# Altium PCB PCB2.PcbDoc
Units mil, origin at the board's own origin, x right, y up, seen from the top; angles counter-clockwise.
Board outline 800 x 1050 mil, 2 copper layers (Top Layer, Bottom Layer); 19 components, 43 nets, 110 pads, 1 vias.
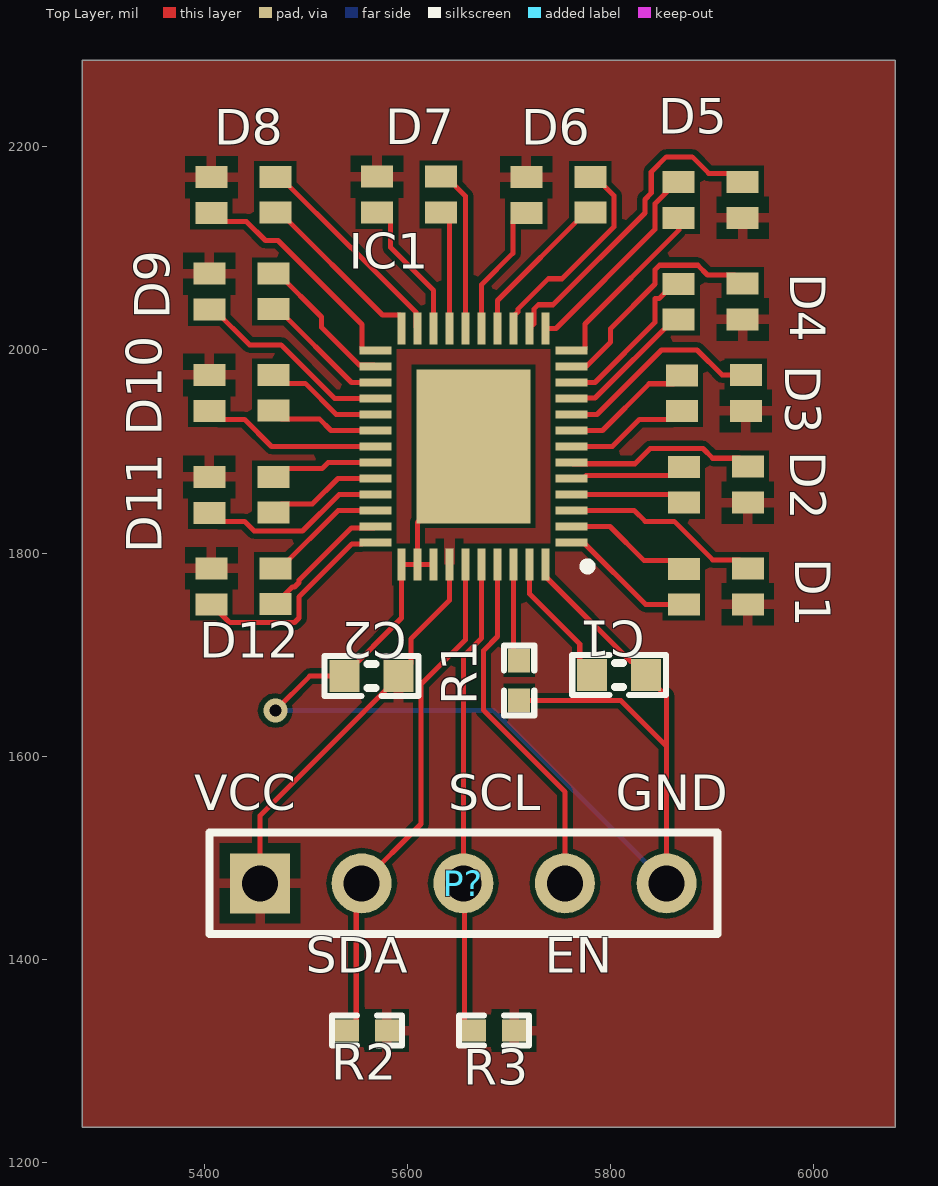
[diagram p0: Top Layer view]
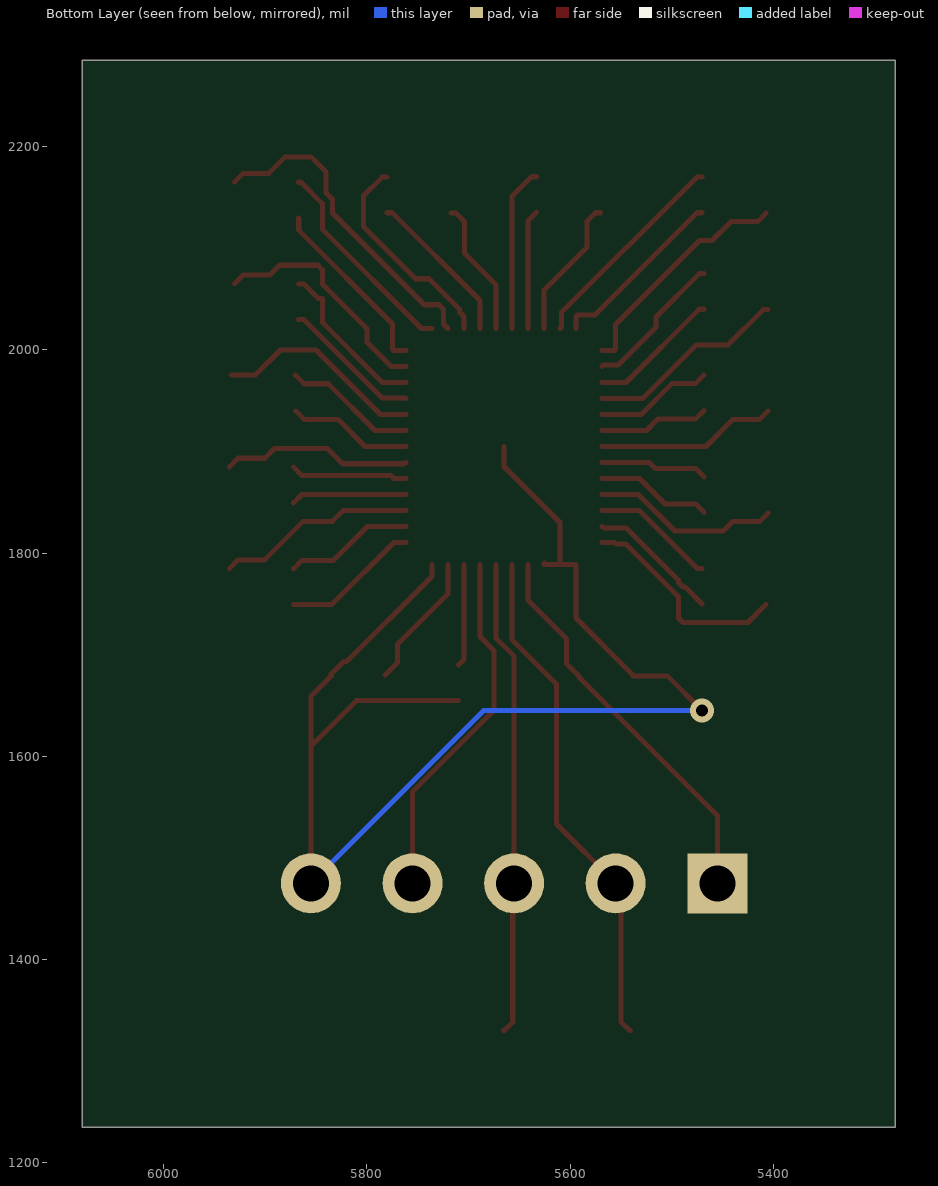
[diagram p1: Bottom Layer view, seen from below]

## Layer stack, top to bottom
Top Solder: solder mask 0.4, Solder Resist, Dk 3.5
Top Layer: signal copper 1.4
Dielectric 1: dielectric 12.6, FR-4, Dk 4.8
Bottom Layer: signal copper 1.4
Bottom Solder: solder mask 0.4, Solder Resist, Dk 3.5

## Board outline
5280,1235 5280,2285 6080,2285 6080,1235

## Design rules (kind name [scope] priority, off if disabled: settings)
Clearance [All] p1: gap=5 ignorepadtopadclearanceinfootprint=FALSE
PolygonConnect [All] p1: connectstyle=Relief reliefconductorwidth=10 reliefentries=4 polygonreliefangle="90 Angle" airgapwidth=10
RoutingVias [All] p1: holewidth=28 width=50 viastyle="Through Hole" minholewidth=28 minwidth=50 maxholewidth=28 maxwidth=50
SolderMaskExpansion [All] p1: expansion=4
Width [All] p1: maxlimit=5 minlimit=5 preferedwidth=5
30 further rules are at their usual default settings.

## Components (designator, comment, footprint, x,y, rotation, side; value= is the part's Value field where it differs from the comment)
C1 "0603 Cap" "0603 Cap" 5808.43,1680 r180 top
C2 "0603 Cap" "0603 Cap" 5564.56,1678.87 r180 top
D1 "Component_1" PCBComponent_1 5872.01,1749.57 r0 top
D2 "Component_1" PCBComponent_1 5872.01,1849.57 r0 top
D3 "Component_1" PCBComponent_1 5870,1940 r0 top
D4 "Component_1" PCBComponent_1 5867.01,2030 r0 top
D5 "Component_1" PCBComponent_1 5867.01,2130 r0 top
D6 "Component_1" PCBComponent_1 5780,2170 r180 top
D7 "Component_1" PCBComponent_1 5632.99,2170.43 r180 top
D8 "Component_1" PCBComponent_1 5470,2170 r180 top
D9 "Component_1" PCBComponent_1 5467.99,2075 r180 top
D10 "Component_1" PCBComponent_1 5467.99,1975.43 r180 top
D11 "Component_1" PCBComponent_1 5467.99,1875 r180 top
D12 "Component_1" PCBComponent_1 5470,1785 r180 top
IC1 "LP5036RJVR" QFN40P500X600X100-47N-D 5665,1905 r180 top
P? "Header 5" HDR1X5 5455,1475 r0 top
R1 "0402 Res" "0402 Res" 5710,1674.69 r270 top
R2 "0402 Res" "0402 Res" 5560,1330 r0 top
R3 "0402 Res" "0402 Res" 5685.31,1330 r0 top

## Footprints (in the part's own frame and the unit in brackets; to place one, negate y for a bottom-side part, rotate by r counter-clockwise, add the part's x,y. Pads: shape width x height; smd on the part's side, far side on the other; paste and mask are expansions set on the pad)
"0402 Res" [mm]
  rect 0.6x0.55 smd: 1(-0.5,0) 2(0.5,0)
  silkscreen extent -0.87,-0.38 0.88,0.38, body extent -0.5,-0.25 0.5,0.25, height 0.3
"0603 Cap" [mm]
  rect 0.75x0.8 smd: 1(-0.675,0) 2(0.675,0)
  silkscreen extent -1.17,-0.5 1.17,0.5, body extent -0.8,-0.43 0.8,0.43, height 0.8
HDR1X5 [mm] "Connector; Header; 5 Position"
  rect 1.5x1.5 hole 0.9: 1(0,0)
  round 1.5 hole 0.9: 2(2.54,0) 3(5.08,0) 4(7.62,0) 5(10.16,0)
  silkscreen extent -1.27,-1.27 11.43,1.27
PCBComponent_1 [mm]
  rect 0.8x0.55 smd: 1(0,0) 2(0,0.889) 3(1.6,0.9) 4(1.6,0)
QFN40P500X600X100-47N-D [mm]
  rect 0.8x0.2 smd: 1(-2.45,2.4) 2(-2.45,2) 3(-2.45,1.6) 4(-2.45,1.2) 5(-2.45,0.8) 6(-2.45,0.4) 7(-2.45,0) 8(-2.45,-0.4) 9(-2.45,-0.8) 10(-2.45,-1.2) 11(-2.45,-1.6) 12(-2.45,-2) 13(-2.45,-2.4) 24(2.45,-2.4) 25(2.45,-2) 26(2.45,-1.6) 27(2.45,-1.2) 28(2.45,-0.8) 29(2.45,-0.4) 30(2.45,0) 31(2.45,0.4) 32(2.45,0.8) 33(2.45,1.2) 34(2.45,1.6) 35(2.45,2) 36(2.45,2.4)
  rect 0.2x0.8 smd: 14(-1.8,-2.95) 15(-1.4,-2.95) 16(-1,-2.95) 17(-0.6,-2.95) 18(-0.2,-2.95) 19(0.2,-2.95) 20(0.6,-2.95) 21(1,-2.95) 22(1.4,-2.95) 23(1.8,-2.95) 37(1.8,2.95) 38(1.4,2.95) 39(1,2.95) 40(0.6,2.95) 41(0.2,2.95) 42(-0.2,2.95) 43(-0.6,2.95) 44(-1,2.95) 45(-1.4,2.95) 46(-1.8,2.95)
  rect 2.85x3.85 smd: 47(0,0)
  silkscreen extent -2.95,2.9 -2.75,3.1, body extent -2.55,-3.05 2.55,3.05, height 1

## Part data
IC1: "Integrated Circuit", Manufacturer_Name="Texas Instruments", Mouser Part Number=595-LP5036RJVR, Datasheet Link=http://www.ti.com/lit/ds/symlink/lp5030.pdf, Height=1mm, Manufacturer_Part_Number=LP5036RJVR, Mouser Price/Stock=https://www.mouser.com/Search/Refine.aspx?Keyword=595-LP5036RJVR
P?: "Header, 5-Pin", LatestRevisionDate=17-Jul-2002, LatestRevisionNote="Re-released for DXP Platform.", Publisher="Altium Limited"

## Via types
v1: diameter 23.62, hole 11.81, Top Layer to Bottom Layer, tented both sides, 1 vias

## Nets (pads, with @x,y where several pads share a name; then routed paths per layer and width w, separated by ;. In a path a pad name is that pad's centre, name@x,y a point inside that pad or via, vN(x,y) a via of type N, cw(c..) or ccw(c..) an arc to the next point about the centre after c; other vN are vias at no path point)
EN: IC1.43 P?.4 | length 352.6
  Top Layer w5: IC1.43 5688.62,1717.83 5675,1704.21 5675,1645 5755,1565 P?.4
GND: C1.1 C2.2 IC1.37 IC1.38 IC1.39 IC1.46 IC1.47 P?.5 R1.2 | length 1371.2
  Top Layer w5: v1(5470,1645) 5503.87,1678.87 C2.2 5537.98,1679.85 5594.13,1736 IC1.37 IC1.38 ; IC1.39 5625.63,1789.37 5625,1790 5625,1789.67 5624.19,1788.86 IC1.38 ; IC1.47 5665,1885.32 5609.88,1830.2 IC1.38 ; R1.2 5810,1655 5855,1610 ; IC1.46 5735.87,1777.05 5819.67,1693.25 5822.74,1693.25 5835,1680.98 C1.1 5835,1679.02 5855,1659.02 5855,1610 ; P?.5 5855,1610
  Bottom Layer w5: v1(5470,1645) 5685,1645 P?.5
NetC1_2: C1.2 IC1.45 | length 134.4
  Top Layer w5: IC1.45 5720.12,1759.88 5769.59,1710.41 5769.59,1692.26 C1.2
NetIC1_44: IC1.44 R1.1 | length 101.1
  Top Layer w5: IC1.44 5704.37,1695.31 R1.1@5709.69,1690
OUT0: D1.1 IC1.1 | length 135.8
  Top Layer w5: IC1.1 5773.27,1810.51 5834.21,1749.57 D1.1
OUT1: D1.2 IC1.2 | length 127.8
  Top Layer w5: IC1.2 5799.33,1826.26 5832.7,1792.89 5863.68,1792.89 D1.2
OUT2: D1.3 IC1.3 | length 197.2
  Top Layer w5: IC1.3 5823.17,1842.01 5833.94,1831.24 5862.52,1831.24 5900.43,1793.33 5926.67,1793.33 D1.3
OUT3: D2.1 IC1.4 | length 113.9
  Top Layer w5: IC1.4 5863.82,1857.76 D2.1
OUT4: D2.2 IC1.5 | length 115.1
  Top Layer w5: IC1.5 5773.27,1873.5 5776,1876.24 5863.68,1876.24 D2.2
OUT5: D2.3 IC1.6 | length 187.7
  Top Layer w5: IC1.6 5762.78,1887.93 5823.92,1887.93 5838.89,1902.89 5890.86,1902.89 5900.43,1893.33 5926.67,1893.33 D2.3
OUT6: D3.1 IC1.7 | length 123
  Top Layer w5: IC1.7 5801.67,1905 5828.35,1931.67 5861.67,1931.67 D3.1
OUT7: D3.2 IC1.8 | length 131
  Top Layer w5: IC1.8 5792.05,1920.75 5837.97,1966.67 5861.67,1966.67 D3.2
OUT8: D3.3 IC1.9 | length 208
  Top Layer w5: IC1.9 5786.5,1936.5 5850,2000 5885,2000 5909.57,1975.43 D3.3
OUT9: D4.1 IC1.10 | length 137.8
  Top Layer w5: IC1.10 5761.83,1952.62 5784.7,1952.62 5862.09,2030 D4.1
OUT10: D4.2 IC1.11 | length 159.5
  Top Layer w5: IC1.11 5784.68,1967.99 5843.76,2027.07 5843.76,2050.65 5847.74,2050.65 5862.09,2065 D4.2
OUT11: D4.3 IC1.12 | length 233.3
  Top Layer w5: IC1.12 5776,1983.74 5800,2007.74 5800,2021.03 5843.76,2064.79 5843.76,2078.93 5848.15,2083.33 5885.86,2083.33 5895.43,2073.76 5921.67,2073.76 D4.3
OUT12: D5.1 IC1.13 | length 181.2
  Top Layer w5: IC1.13 5773.27,1999.49 5774.7,2000.93 5774.7,2025.56 5867.01,2117.87 D5.1
OUT13: D5.2 IC1.14 | length 205.5
  Top Layer w5: IC1.14 5746.14,2021.14 5843.76,2118.76 5843.76,2143.93 5864.83,2165 D5.2
OUT14: D5.3 IC1.15 | length 318.7
  Top Layer w5: IC1.15 5724.43,2025.45 5724.43,2040 5728.82,2044.39 5742.91,2044.39 5743.14,2044.16 5833.76,2134.78 5833.76,2148.08 5840,2154.32 5840,2175.17 5854.83,2190 5880.26,2190 5896.5,2173.76 5921.67,2173.76 D5.3
OUT15: D6.1 IC1.16 | length 210.2
  Top Layer w5: IC1.16 5704.37,2032.95 5708.68,2037.26 5708.68,2040 5738.68,2070 5752.18,2070 5803.25,2121.07 5803.25,2151.67 5784.92,2170 D6.1
OUT16: D6.2 IC1.17 | length 154.6
  Top Layer w5: IC1.17 5688.62,2048.54 5775.08,2135 D6.2
OUT17: D6.3 IC1.18 | length 134.6
  Top Layer w5: IC1.18 5672.87,2064.15 5703.76,2095.04 5703.76,2126.24 5712.09,2134.57 D6.3
OUT18: D7.1 IC1.19 | length 162.2
  Top Layer w5: D7.1 5637.91,2170.43 5657.13,2151.22 5657.13,2092.97 IC1.19
OUT19: D7.2 IC1.20 | length 117.8
  Top Layer w5: D7.2 5633.05,2135.43 5641.38,2127.11 IC1.20
OUT20: D7.3 IC1.21 | length 139.8
  Top Layer w5: D7.3 5574.92,2135 5583.25,2126.67 5583.25,2101 5625.63,2058.62 IC1.21
OUT21: D8.1 IC1.22 | length 210.1
  Top Layer w5: D8.1 5474.92,2170 5544.09,2100.83 5544.73,2100.83 5608.44,2037.12 5608.44,2022.58 IC1.22
OUT22: D8.2 IC1.23 | length 178.2
  Top Layer w5: D8.2 5474.92,2135 5575.53,2034.39 5592.7,2034.39 5594.13,2032.95 IC1.23
OUT23: D8.3 IC1.24 | length 231.5
  Top Layer w5: D8.3 5415.33,2126.24 5441.58,2126.24 5460.23,2107.59 5472.59,2107.59 5555.3,2024.88 5555.3,2000.93 5556.73,1999.49 IC1.24
OUT24: D9.1 IC1.25 | length 144.3
  Top Layer w5: D9.1 5472.91,2075 5515.46,2032.45 5515.46,2022.28 5552.56,1985.18 5567.11,1985.18 IC1.25
OUT25: D9.2 IC1.26 | length 130.4
  Top Layer w5: D9.2 5472.91,2040 5544.92,1967.99 IC1.26
OUT26: D9.3 IC1.27 | length 199.7
  Top Layer w5: D9.3 5409.92,2039.57 5444.49,2005 5475.61,2005 5528.36,1952.24 IC1.27
OUT27: D10.1 IC1.28 | length 116.7
  Top Layer w5: D10.1 5476.32,1967.11 5499.36,1967.11 5529.97,1936.5 IC1.28
OUT28: D10.2 IC1.29 | length 108.7
  Top Layer w5: D10.2 5476.32,1932.11 5513.31,1932.11 5524.67,1920.75 IC1.29
OUT29: D10.3 IC1.30 | length 178
  Top Layer w5: D10.3 5413.33,1931.67 5439.57,1931.67 5466.24,1905 IC1.30
OUT30: D11.1 IC1.31 | length 106.5
  Top Layer w5: D11.1 5476.32,1883.33 5516.02,1883.33 5521.95,1889.25 IC1.31
OUT31: D11.2 IC1.32 | length 114.4
  Top Layer w5: D11.2 5476.32,1848.33 5506.4,1848.33 5531.57,1873.5 IC1.32
OUT32: D11.3 IC1.33 | length 185.9
  Top Layer w5: D11.3 5413.33,1831.24 5439.57,1831.24 5449.14,1821.67 5496.67,1821.67 5532.76,1857.76 IC1.33
OUT33: D12.1 IC1.34 | length 122.2
  Top Layer w5: D12.1 5474.92,1785 5531.93,1842.01 IC1.34
OUT34: D12.2 IC1.35 | length 131.4
  Top Layer w5: D12.2 5486.67,1766.67 5488.85,1766.67 5493.25,1771.07 5493.25,1773.25 5544.82,1824.82 5567.11,1824.82 IC1.35
OUT35: D12.3 IC1.36 | length 213.8
  Top Layer w5: D12.3 5424.9,1731.67 5488.85,1731.67 5493.25,1736.07 5493.25,1756.92 5545.4,1809.07 5555.3,1809.07 5556.73,1810.51 IC1.36
SCL: IC1.42 P?.3 R3.1 | length 472.1
  Top Layer w5: P?.3@5654.41,1474.41 P?.3 ; R3.1 5664.65,1330 5656.32,1338.33 5656.32,1473.68 P?.3 ; IC1.42 5672.87,1716.23 5655,1698.35 P?.3
SDA: IC1.41 P?.2 R2.1 | length 507.8
  Top Layer w5: R2.1 5541.3,1330 5549.63,1338.33 5549.63,1469.63 P?.2 5613.4,1533.4 5613.4,1670.89 5657.13,1714.62 IC1.41
VCC: C2.1 D1.4 D2.4 D3.4 D4.4 D5.4 D6.4 D7.4 D8.4 D9.4 D10.4 D11.4 D12.4 IC1.40 P?.1 R2.2 R3.2 | length 391.1
  Top Layer w5: P?.1 5455,1541.75 5591.13,1677.88 C2.1 5603.4,1691.13 5603.4,1715.59 5641.38,1753.57 IC1.40

## Polygon pours and split planes (outlines as drawn)
VCC on Top Layer (solid, pour order 0): 5280,2285 5280,1235 6080,1235 6080,2285

## Silkscreen, mask and mechanical layers (free items; w line width, h text height)
Top Overlay:
  text "VCC" at 5390,1535 h60
  text "SCL" at 5640,1535 h60
  text "GND" at 5805,1535 h60
  text "SDA" at 5500,1375 h60
  text "EN" at 5735,1375 h60
Board Outline:
  the board outline again, w10